# EAGLE board tvbgone3 (EAGLE 5.11)
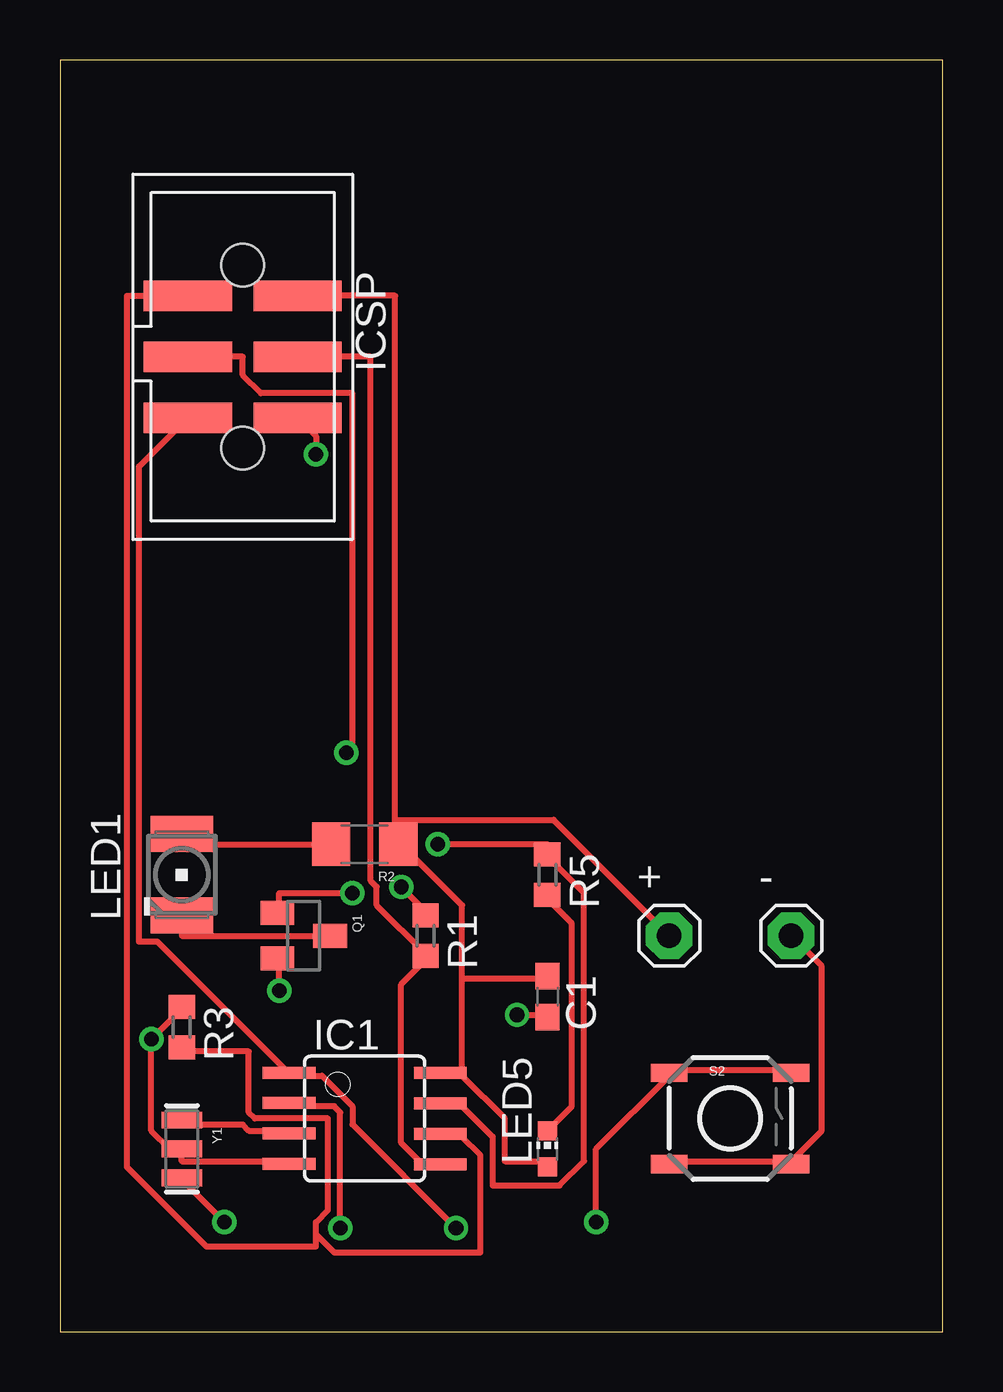
[diagram p0: board, top side]
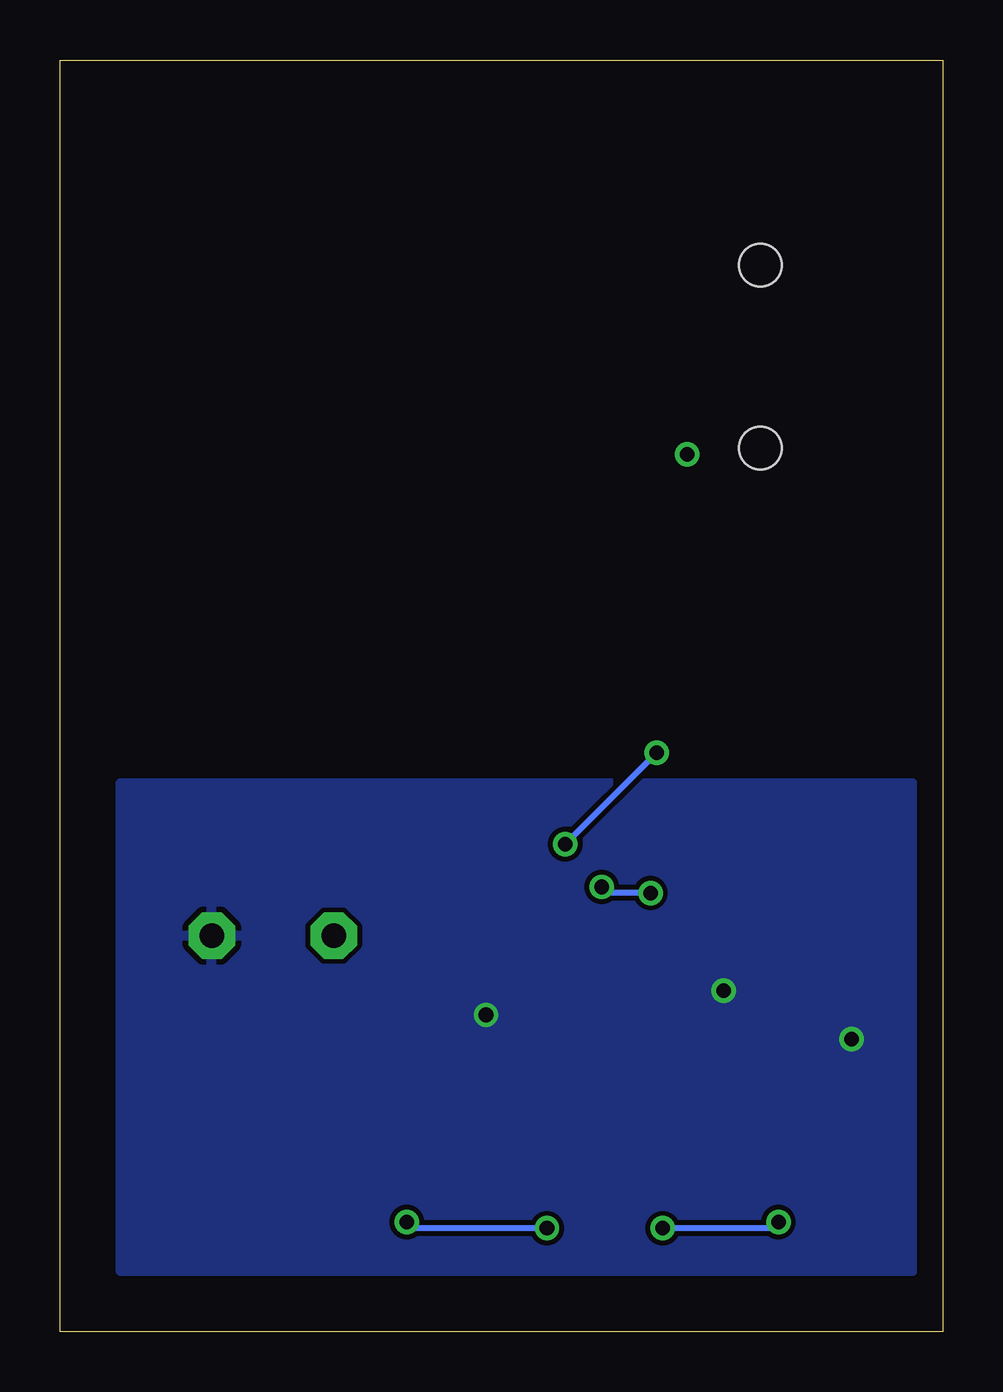
[diagram p1: board, bottom side, seen from below]

Size 36.81 x 53.01 mm. Coordinates in mm from the lower left corner, seen from the top.
Outline: 0,0 36.81,0 36.81,53.01 0,53.01 0,0
Copper layers (1*16): Top 0.035mm / dielectric 1.5mm / Bottom 0.035mm
Design rules "default": minimum track width 10mil, minimum drill 24mil, track to track 8mil, track to pad 8mil, pad to pad 8mil, via to via 8mil, smd to smd 8mil, copper to edge 40mil, drill to drill 8mil, minimum pad ring 10mil, minimum via ring 8mil, stop-mask expansion 4mil, vias tented up to drill 0mil, thermal gap 10mil

## Footprints (pad centres in the part's own frame; a part is rotated, then mirrored left to right if it is on the bottom)
1X01 = drill 1.016 pad 1.93 octagon: 1 0,0
C0603 = smd 1.1 x 1: 1 -0.85,0; 2 0.85,0
SOIC8 = smd 0.5 x 2.2: 1 -1.905,-3.154; 2 -0.645,-3.154; 3 0.625,-3.154; 4 1.895,-3.154; 5 1.905,3.154; 6 0.635,3.154; 7 -0.635,3.154; 8 -1.905,3.154
2X3SMT = smd 1.27 x 3.683: 1 -2.54,-2.286; 2 -2.54,2.286; 3 0,-2.286; 4 0,2.286; 5 2.54,-2.286; 6 2.54,2.286 | hole 1.778: -3.81,0; 3.81,0
PLCC2 = smd 2.6 x 1.5: A 0,1.7; C 0,-1.7
CHIP-LED0603 = smd 0.8 x 0.8: A 0,-0.75; C 0,0.75
SOT23 = smd 1 x 1.4: 1 -0.95,-1.1; 2 0.95,-1.1; 3 0,1.1
R0603 = smd 1 x 1.1: 1 -0.85,0; 2 0.85,0
1206 = smd 1.6 x 1.8: 1 -1.4,0; 2 1.4,0
TACTILE_SWITCH_SMD = smd 1.524 x 0.762: 1 -2.54,1.905; 2 2.54,1.905; 3 -2.54,-1.905; 4 2.54,-1.905
RESONATOR-SMD = smd 0.7 x 1.7: 1 -1.2,0; 2 0,0; 3 1.2,0

## Placement (x,y rotation side)
+  [1X01]  25.4,16.51 0 top
-  [1X01]  30.48,16.51 0 top
C1  0.1uF  [C0603]  20.32,13.97 270 top
IC1  ATTINY85V-10S  [SOIC8]  12.7,8.89 270 top
ICSP  PINHD-2X3  [2X3SMT]  7.62,40.64 270 top
LED1  LG_T679-E1F1-1  [PLCC2]  5.08,19.05 0 top
LED5  RED  [CHIP-LED0603]  20.32,7.62 0 top
Q1  MMBT2222A  [SOT23]  10.16,16.51 270 top
R1  1.0 K  [R0603]  15.24,16.51 270 top
R2  [1206]  12.7,20.32 180 top
R3  10K  [R0603]  5.08,12.7 270 top
R5  1K  [R0603]  20.32,19.05 270 top
S2  [TACTILE_SWITCH_SMD]  27.94,8.89 0 top
Y1  RESONATORSMD  [RESONATOR-SMD]  5.08,7.62 270 top

## Library data of the parts
+ - = ybox2
C1 R1 R3 R5 = rcl-ez
IC1 = avr
ICSP = adaprog
LED1 = led; COLOR: green
LED5 = minimidi
Q1 R2 S2 Y1 = SparkFun

## Nets
GND: -.1 C1.2 IC1.4 ICSP.6 Q1.2 R3.1 S2.3 S2.4 Y1.2
MISO: IC1.6 ICSP.1 R3.2
MOSI: IC1.5 ICSP.4 R1.2
N$1: IC1.3 Y1.1
N$2: IC1.2 Y1.3
N$3: LED5.C R5.2
N$4: LED1.C Q1.3
N$6: Q1.1 R1.1
N$7: LED1.A R2.2
RST: IC1.1 ICSP.5 S2.1 S2.2
SCK: IC1.7 ICSP.3 R5.1
VCC: +.1 C1.1 IC1.8 ICSP.2 LED5.A R2.1

## Tracks (layer width: path | path; a pad name or v marks a point on that pad's centre or on a via)
GND  (via drill 0.61)
  Top 0.254: R3.1 5.08,13.46 v3.81,12.19 3.81,8.38 4.57,7.62 Y1.2 5.08,7.11 9.4,7.11 IC1.4 | 30.48,7.11 25.4,7.11 S2.3 | v19.05,13.21 20.32,13.21 C1.2 | v9.14,14.22 9.14,15.49 Q1.2 | 30.48,7.11 31.75,8.38 31.75,15.24 -.1 | 30.48,7.11 S2.4 | ICSP.6 10.67,37.34 v10.67,36.58
  pour Bottom: 1.27,22.86 34.29,22.86 34.29,2.54 1.27,2.54
MISO
  Top 0.254: 10.67,4.06 10.67,4.57 11.18,5.08 11.18,8.89 8.13,8.89 7.87,9.14 7.87,11.68 5.08,11.68 R3.2 | 10.67,4.06 11.43,3.3 17.53,3.3 17.53,7.37 16.76,8.13 16,8.13 IC1.6 | ICSP.1 2.79,43.18 2.79,6.86 6.1,3.56 10.67,3.56 10.67,4.06
MOSI
  Top 0.254: IC1.5 15.75,7.11 14.99,7.11 14.22,7.87 14.22,14.48 15.24,15.49 R1.2 15.24,15.75 13.21,17.78 13.21,18.54 12.95,18.8 12.95,40.64 ICSP.4
N$1
  Top 0.254: Y1.1 5.08,8.64 7.62,8.64 7.87,8.38 9.4,8.38 IC1.3
N$2  (via drill 0.61)
  Top 0.254: v6.86,4.57 5.08,6.35 Y1.3 | v11.68,4.32 11.68,9.14 11.43,9.4 9.65,9.4 IC1.2
  Bottom 0.254: v6.86,4.57 7.11,4.32 v11.68,4.32
N$3
  Top 0.254: LED5.C 20.32,8.38 21.34,9.4 21.34,17.02 20.32,18.03 R5.2
N$4
  Top 0.254: Q1.3 5.08,16.51 LED1.C
N$6  (via drill 0.61)
  Top 0.254: v14.22,18.54 15.24,17.53 R1.1 | v12.19,18.29 9.14,18.29 9.14,17.53 Q1.1
  Bottom 0.254: v14.22,18.54 13.97,18.29 v12.19,18.29
N$7
  Top 0.254: R2.2 5.08,20.32 LED1.A
RST  (via drill 0.61)
  Top 0.254: S2.2 30.48,10.92 25.4,10.92 S2.1 25.4,10.67 22.35,7.62 v22.35,4.57 | ICSP.5 3.3,36.07 3.3,16.26 4.06,16.26 9.4,10.92 IC1.1 9.65,10.67 10.92,10.67 12.19,9.4 12.19,8.64 v16.51,4.32
  Bottom 0.254: v22.35,4.57 22.1,4.32 v16.51,4.32
SCK  (via drill 0.61)
  Top 0.254: IC1.7 16,9.4 16.76,9.4 18.03,8.13 18.03,6.1 20.83,6.1 21.84,7.11 21.84,18.29 20.32,19.81 R5.1 20.32,20.32 v15.75,20.32 | ICSP.3 7.62,40.64 7.62,39.88 8.38,39.12 12.19,39.12 12.19,24.38 v11.94,24.13
  Bottom 0.254: v15.75,20.32 v11.94,24.13
VCC
  Top 0.254: 16.76,10.67 18.54,8.89 18.54,7.11 20.32,7.11 LED5.A | 16.76,10.67 16,10.67 IC1.8 16.76,10.67 | 16.76,14.73 20.32,14.73 C1.1 | 16.76,10.67 16.76,14.73 | 16.76,14.73 16.76,17.78 14.22,20.32 R2.1 13.97,20.32 13.97,21.34 | ICSP.2 13.97,43.18 13.97,21.34 | +.1 20.57,21.34 13.97,21.34